# Altium PCB mLRSrxtx.PcbDoc
Units mm, origin at the board's own origin, x right, y up, seen from the top; angles counter-clockwise.
Board outline 36 x 23 mm, 2 copper layers (Top, Bottom); 21 components, 28 nets, 94 pads, 62 vias.
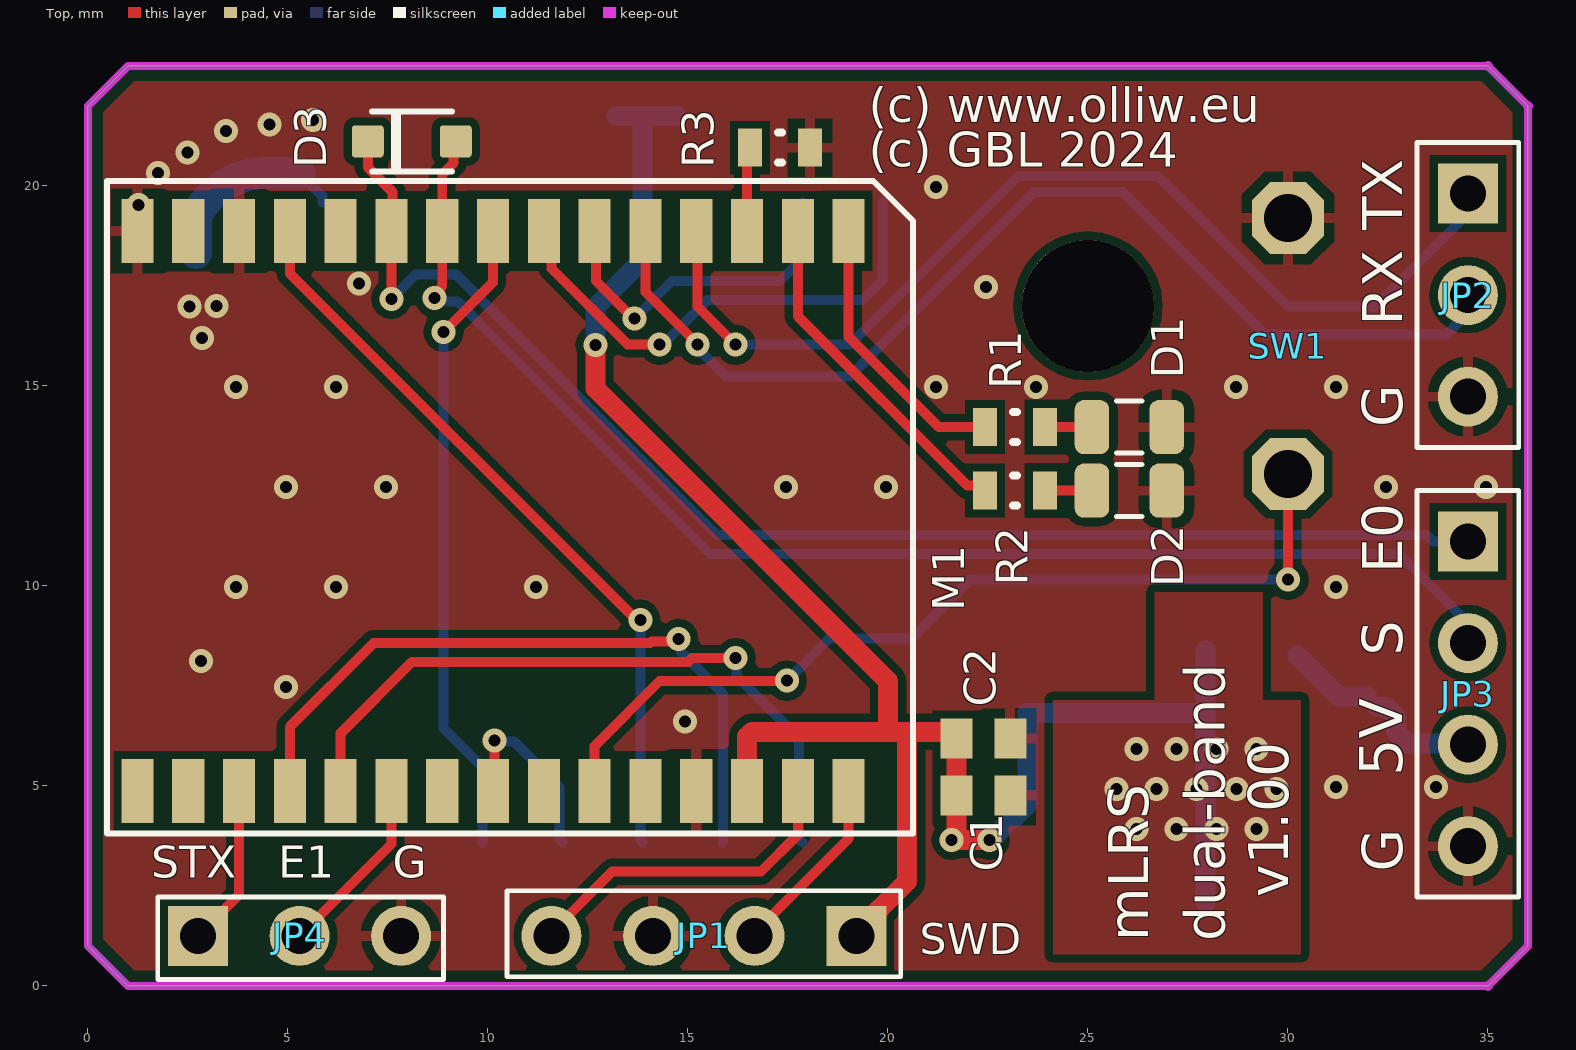
[diagram p0: Top view]
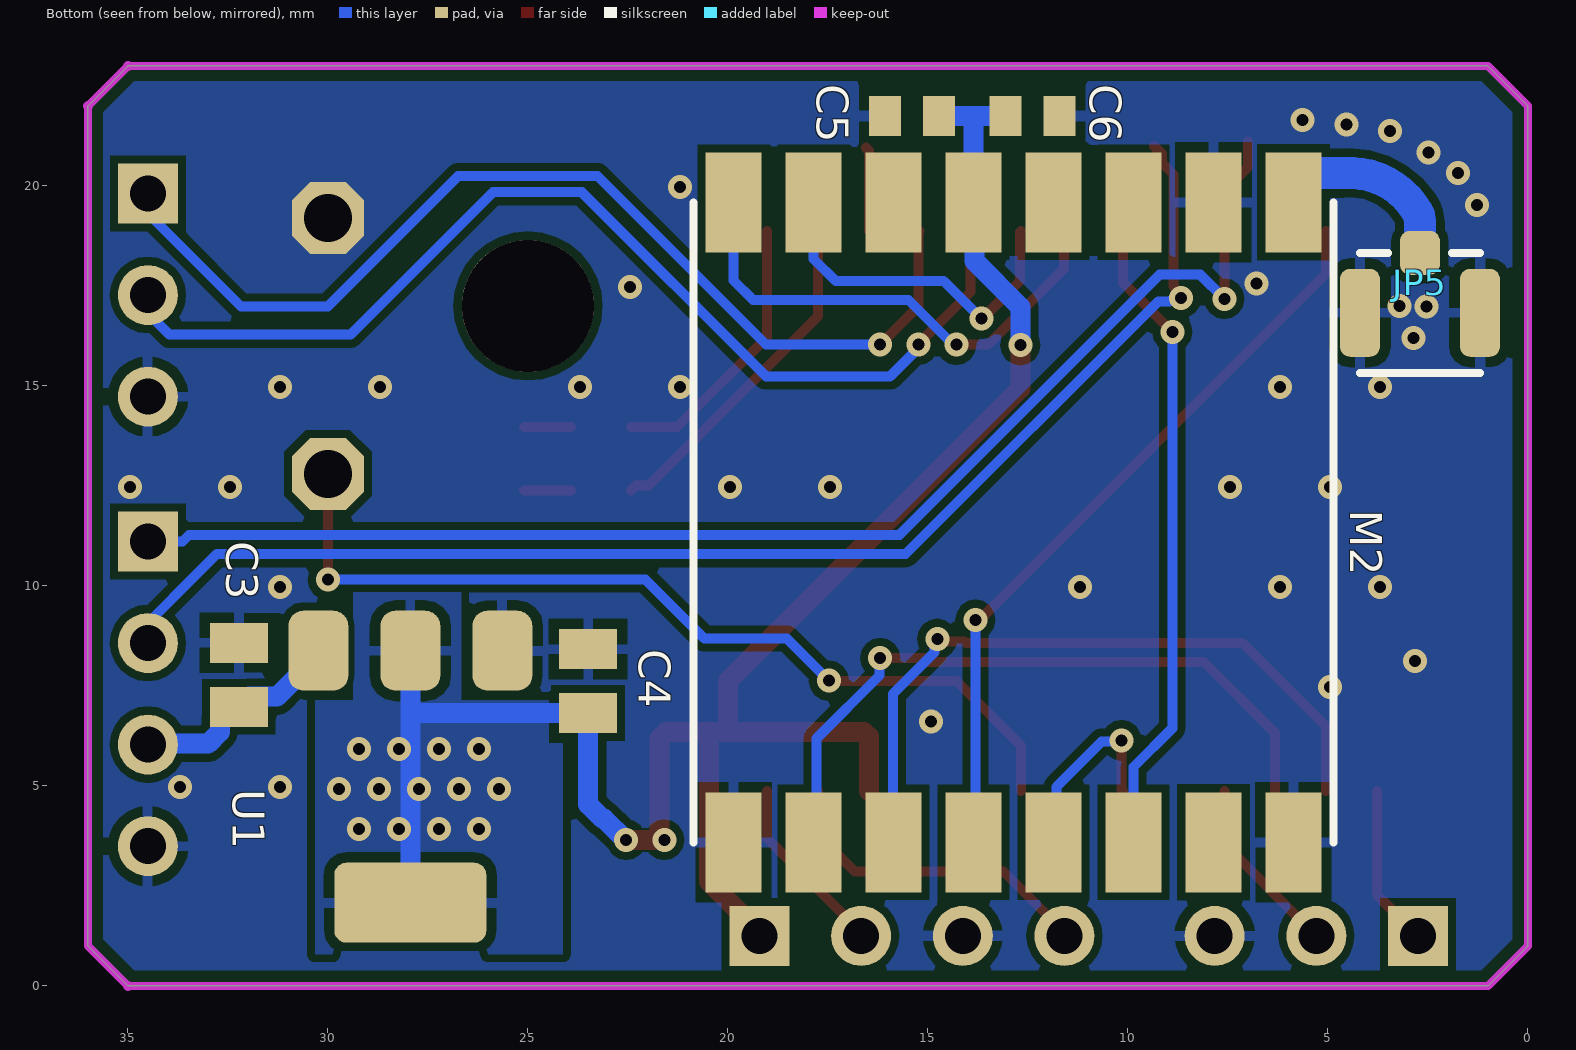
[diagram p1: Bottom view, seen from below]
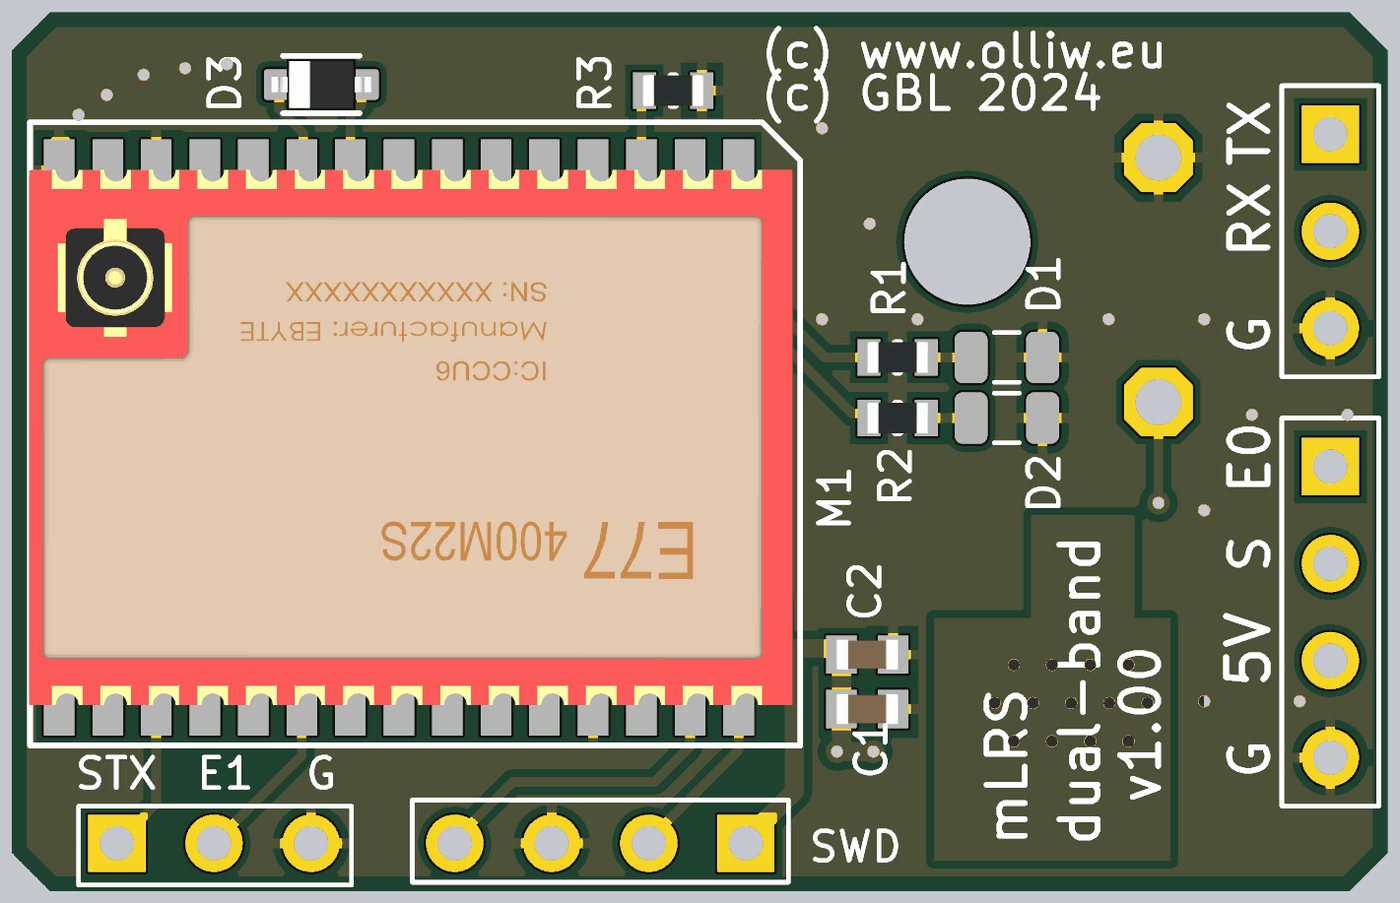
[diagram p2: 3D render of the assembled board from above, using the file's embedded part models]
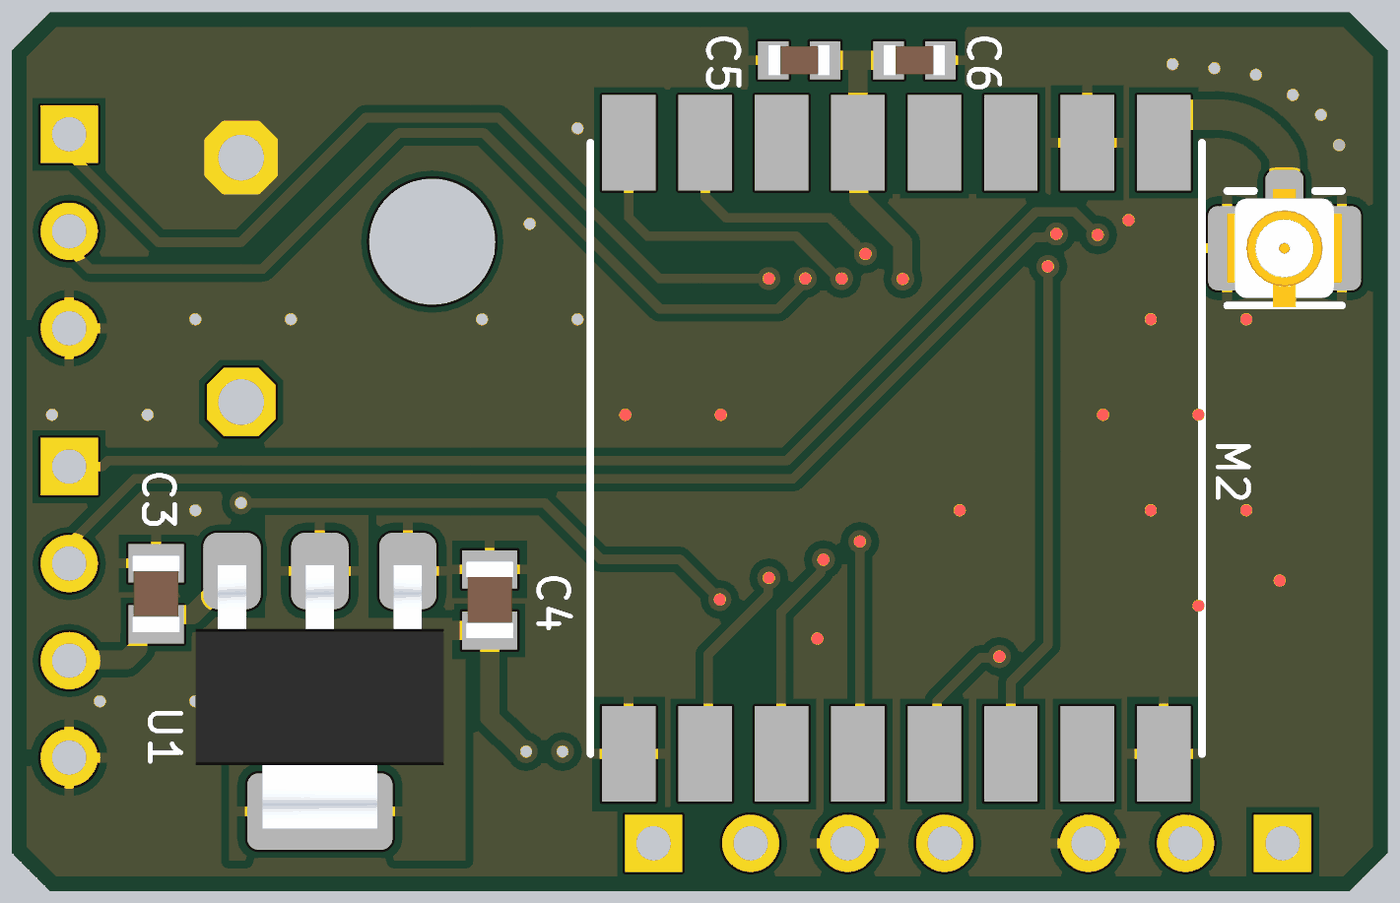
[diagram p3: 3D render of the assembled board from below, using the file's embedded part models]

## Layer stack, top to bottom
Top Solder: solder mask 0.0102, Solder Resist, Dk 3.5
Top: signal copper 0.0356
Dielectric 1: dielectric 0.32, FR-4, Dk 4.8
Bottom: signal copper 0.0356
Bottom Solder: solder mask 0.0102, Solder Resist, Dk 3.5

## Board outline
0,1 1,0 35,0 36,1 36,22 35,23 1,23 0,22

## Design rules (kind name [scope] priority, off if disabled: settings)
BoardOutlineClearance mdCopperDimension [All] p1: gap=0.254 ignorepadtopadclearanceinfootprint=FALSE except(0: Arc-SplitContinuation Track-SplitContinuation SMDPad-SplitContinuation THPad-SplitContinuation Via-SplitContinuation Fill-SplitContinuation Poly-SplitContinuation Region-SplitContinuation Text-SplitContinuation; 0.381: Poly-OutlineEdge Poly-CavityEdge Poly-CutoutEdge Poly-SplitBarrior)
Clearance Clearance_for_PolygonClass_Isolate_8 [InPolygonClass('Isolate_8') vs IsArc Or IsTrack Or IsPad Or IsVia Or IsFill Or IsRegion Or IsText] p1: gap=0.203 ignorepadtopadclearanceinfootprint=FALSE
Clearance [All] p2: gap=0.152 ignorepadtopadclearanceinfootprint=FALSE
HoleSize [All] p1: absolutevalues=TRUE maxlimit=5 minlimit=0.25 maxpercent=80.000 minpercent=20.000
HoleToHoleClearance mdDrill [All] p1: gap=0.152 allowstackedmicrovias=TRUE
MinimumSolderMaskSliver [All] p1 off: minsoldermaskwidth=0.254
PasteMaskExpansion mlMinCreamFrame [All] p1: expansion=0
PolygonConnect PolygonConnect_4 [InComponent('IC1') vs IsNamedPolygon('Polygon_2_Net_GND') Or IsNamedPolygon('3.3V_L02_P035') Or IsNamedPolygon('Polygon_1_Net_GND')] p1: thpad.connectstyle=Relief thpad.reliefconductorwidth=0.254 thpad.reliefentries=4 thpad.polygonreliefangle="90 Angle" thpad.airgapwidth=0.254 smdpad.connectstyle=Direct smdpad.reliefconductorwidth=0.254 smdpad.reliefentries=4 smdpad.polygonreliefangle="90 Angle" smdpad.airgapwidth=0.254 via.connectstyle=Relief via.reliefconductorwidth=0.254 via.reliefentries=4 via.polygonreliefangle="90 Angle" via.airgapwidth=0.254
PolygonConnect PolygonConnect_3 [InComponent('XP1') vs IsNamedPolygon('Polygon_1_Net_GND')] p2: thpad.connectstyle=Relief thpad.reliefconductorwidth=0.254 thpad.reliefentries=4 thpad.polygonreliefangle="90 Angle" thpad.airgapwidth=0.254 smdpad.connectstyle=Direct smdpad.reliefconductorwidth=0.254 smdpad.reliefentries=4 smdpad.polygonreliefangle="90 Angle" smdpad.airgapwidth=0.254 via.connectstyle=Relief via.reliefconductorwidth=0.254 via.reliefentries=4 via.polygonreliefangle="90 Angle" via.airgapwidth=0.254
PolygonConnect PolygonConnect_2 [InComponent('IC2') vs IsNamedPolygon('Polygon_2_Net_GND')] p3: thpad.connectstyle=Relief thpad.reliefconductorwidth=0.254 thpad.reliefentries=4 thpad.polygonreliefangle="90 Angle" thpad.airgapwidth=0.254 smdpad.connectstyle=Direct smdpad.reliefconductorwidth=0.254 smdpad.reliefentries=4 smdpad.polygonreliefangle="90 Angle" smdpad.airgapwidth=0.254 via.connectstyle=Relief via.reliefconductorwidth=0.254 via.reliefentries=4 via.polygonreliefangle="90 Angle" via.airgapwidth=0.254
PolygonConnect PolygonConnect_1 [InComponent('IC3') vs IsNamedPolygon('Polygon_1_Net_GND')] p4: thpad.connectstyle=Relief thpad.reliefconductorwidth=0.254 thpad.reliefentries=4 thpad.polygonreliefangle="90 Angle" thpad.airgapwidth=0.254 smdpad.connectstyle=Direct smdpad.reliefconductorwidth=0.254 smdpad.reliefentries=4 smdpad.polygonreliefangle="90 Angle" smdpad.airgapwidth=0.254 via.connectstyle=Relief via.reliefconductorwidth=0.254 via.reliefentries=4 via.polygonreliefangle="90 Angle" via.airgapwidth=0.254
PolygonConnect PolygonConnect_For_PolygonThermal_ON_Width100000_Gap100000 [InPolygonClass('PolygonThermal_ON_Width100000_Gap100000') vs Not IsVia] p5: connectstyle=Relief reliefconductorwidth=0.254 reliefentries=4 polygonreliefangle="90 Angle" airgapwidth=0.254
PolygonConnect PolygonConnect_For_PolygonThermal_ON_Width80000_Gap100000 [InPolygonClass('PolygonThermal_ON_Width80000_Gap100000') vs Not IsVia] p6: connectstyle=Relief reliefconductorwidth=0.203 reliefentries=4 polygonreliefangle="90 Angle" airgapwidth=0.254
PolygonConnect PolygonConnect_For_PolygonThermal_OFF [InPolygonClass('PolygonThermal_OFF')] p7: connectstyle=Direct reliefconductorwidth=0.254 reliefentries=4 polygonreliefangle="90 Angle" airgapwidth=0.254
PolygonConnect ThermalVias [IsVia] p8: connectstyle=Direct reliefconductorwidth=0.254 reliefentries=4 polygonreliefangle="90 Angle" airgapwidth=0.254
PolygonConnect [All] p9: connectstyle=Relief reliefconductorwidth=0.254 reliefentries=4 polygonreliefangle="90 Angle" airgapwidth=0.254
RoutingVias [All] p1: holewidth=0.33 width=0.686 viastyle="Through Hole" minholewidth=0.33 minwidth=0.686 maxholewidth=2.54 maxwidth=2.54
SilkToSilkClearance [All] p1: silktosilkclearance=0.1
SilkToSolderMaskClearance [IsPad] p1: minsilkscreentomaskgap=0.05 clearancetoexposedcopper=TRUE
SolderMaskExpansion mlMinStopFrame [All] p1: expansion=0.064 istentingtop=FALSE
SupplyNets "Schematic Supply Nets_2" [InNet('GND')] p1: voltage=0.000
SupplyNets "Schematic Supply Nets_1" [InNet('3.3V')] p2: voltage=0.000
SupplyNets "Schematic Supply Nets" [InNet('VCC')] p3: voltage=0.000
Width [All] p1: maxlimit=3 minlimit=0.2 preferedwidth=0.25
24 further rules are at their usual default settings.

## Classes and differential pairs
polygon class PolygonThermal_ON_Width100000_Gap100000: Polygon_1_Net_GND Polygon_2_Net_GND
polygon class Isolate_8: Polygon_1_Net_GND Polygon_2_Net_GND

## Components (designator, comment, footprint, x,y, rotation, side; value= is the part's Value field where it differs from the comment)
C1 "nc" C-0603 22.384,4.763 r0 top
C2 "nc" C-0603 22.384,6.191 r0 top
C3 "nc" C-0805 32.226,7.779 r90 bottom
C4 "nc" C-0805 23.495,7.62 r90 bottom
C5 "nc" C-0603 15.399,21.749 r0 bottom
C6 "nc" C-0603 12.383,21.749 r180 bottom
D1 "LED_1" LED_0805 26.035,13.97 r180 top
D2 "LED_1" LED_0805 26.035,12.383 r180 top
D3 "DIODSH" SOD-323 8.096,21.114 r0 top
JP1 "Header 4" HDR1X4 19.209,1.25 r180 top locked
JP2 "Header 3" HDR1X3 34.5,19.812 r270 top locked
JP3 "Header 4" HDR1X4 34.5,11.112 r270 top
JP4 "Header 3" HDR1X3 2.75,1.25 r0 top locked
JP5 "U.FL-R-SMT-1" U.FL-R-SMT-1 2.699,16.828 r180 bottom value={Value}
M1 "E77-400M22S" E77XX-M22 10.128,11.874 r270 top
M2 "LORA1262" LGA16_LORA1280 12.859,11.589 r90 bottom
R1 "RES" R-0603 23.177,13.97 r180 top
R2 "RES" R-0603 23.177,12.383 r180 top
R3 "RES" R-0603 17.304,20.955 r180 top
SW1 "BUTTON6X3.5" BUTTON-THT 30,16 r90 top
U1 "LDL1117S33R" SOT223 27.94,5.08 r0 bottom value={Value}

## Footprints (in the part's own frame and the unit in brackets; to place one, negate y for a bottom-side part, rotate by r counter-clockwise, add the part's x,y. Pads: shape width x height; smd on the part's side, far side on the other; paste and mask are expansions set on the pad)
BUTTON-THT [mm] "BUTTON-THT"
  oct 1.8x1.8 / inner round 1.663 / far side oct 1.8x1.8 hole 1.2: 1(-3.2,0) 2(3.2,0)
C-0603 [mm] "Chip Capacitor, 2-Leads, Body 1,60x0,80mm, IPC Medium Density"
  rect 0.8x1 smd: 1(-0.675,0) 2(0.675,0)
  body extent -0.8,-0.4 0.8,0.4, height 0.8
C-0805 [mm] "Chip Capacitor, 2-Leads, Body 2,00x1,25mm, IPC Medium Density"
  rect 1x1.45 smd: 1(-0.8,0) 2(0.8,0)
  body extent -1,-0.63 1,0.63, height 1.25
E77XX-M22 [mm]
  rect 1.6x0.8 smd: 1(-7,8.89) 2(-7,7.62) 3(-7,6.35) 4(-7,5.08) 5(-7,3.81) 6(-7,2.54) 7(-7,1.27) 8(-7,0) 9(-7,-1.27) 10(-7,-2.54) 11(-7,-3.81) 12(-7,-5.08) 13(-7,-6.35) 14(-7,-7.62) 15(-7,-8.89) 16(7,-8.89) 17(7,-7.62) 18(7,-6.35) 19(7,-5.08) 20(7,-3.81) 21(7,-2.54) 22(7,-1.27) 23(7,0) 24(7,1.27) 25(7,2.54) 26(7,3.81) 27(7,5.08) 28(7,6.35) 29(7,7.62) 30(7,8.89)
  silkscreen extent -8.25,-9.65 8.06,10.5, body extent -7,-9.68 7,10.3, height 2.7
HDR1X3 [mm] "Connector; Header; 3 Position"
  rect 1.5x1.5 hole 0.9: 1(0,0)
  round 1.5 hole 0.9: 2(2.54,0) 3(5.08,0)
  silkscreen extent -1.27,-1.27 6.35,1.27
HDR1X4 [mm] "Connector; Header; 4 Position"
  rect 1.5x1.5 hole 0.9: 1(0,0)
  round 1.5 hole 0.9: 2(2.54,0) 3(5.08,0) 4(7.62,0)
  silkscreen extent -1.11,-1.13 8.73,1.02
LED_0805 [mm] "LED, Chip; 2.00 mm L X 1.25 mm W X 0.80 mm H body"
  rrect51% 0.86x1.35 smd: A(0.935,0) K(-0.935,0)
  silkscreen extent -0.33,-0.65 0.33,0.65, body extent -1,-0.63 1,0.63, height 0.25
LGA16_LORA1280 [mm]
  rect 2.5x1.4 smd: 1(-8,7) 2(-8,5) 3(-8,3) 4(-8,1) 5(-8,-1) 6(-8,-3) 7(-8,-5) 8(-8,-7) 9(8,-7) 10(8,-5) 11(8,-3) 12(8,-1) 13(8,1) 14(8,3) 15(8,5) 16(8,7)
  silkscreen extent -8,-8 8,8, body extent -7.5,-7.51 7.5,7.51, height 1.5
R-0603 [mm] "Chip Resistor, 2-Leads, Body 1,60x0,82mm, IPC Medium Density"
  rect 0.6x0.95 smd: 1(-0.75,0) 2(0.75,0)
  silkscreen extent -0.05,-0.38 0.05,0.38, body extent -0.8,-0.4 0.8,0.4, height 0.45
SOD-323 [mm]
  rrect20% 0.8x0.8 smd mask+0.07: 1(-1.1,0) 2(1.1,0)
  silkscreen extent -1,-0.75 1,0.75, body extent -1.3,-0.68 1.3,0.67, height 1.1
SOT223 [mm]
  rrect50% 1.5x2 smd: 1(-2.3,-3.3) 2(0,-3.3) 3(2.3,-3.3)
  rrect30% 3.8x2 smd: 4(0,3)
  body extent -3.25,-3.45 3.25,3.45, height 1.7
U.FL-R-SMT-1 [mm]
  rrect50% 1x1.1 smd mask+0.06: 1(0,1.5)
  rrect50% 1x2.2 smd mask+0.06: 2(-1.5,0) 2(1.5,0)
  silkscreen extent -1.5,-1.5 1.5,1.5, body extent -1.5,-1.55 1.5,1.55, height 1.25

## Part data
C1 C2 C3 C4 C5 C6: library part CAPN, Voltage=50V, Вид=Конденсатор, Точність/група=NP0
JP1 JP3: "Header, 4-Pin", LatestRevisionDate=17-Jul-2002, LatestRevisionNote="Re-released for DXP Platform.", Publisher="Altium Limited"
JP2 JP4: "Header, 3-Pin", LatestRevisionDate=17-Jul-2002, LatestRevisionNote="Re-released for DXP Platform.", Publisher="Altium Limited"
D1 D2: Вид=Світлодіод
D3: Вид=Діод
JP5 U1: Mounting  Method=SMD
R1 R2 R3: Вид=Резистор, Точність/група=5%
SW1: DeviceName=6X3.5, DeviceSetName=BUTTON, GateName_1=G$1, LibraryName="# stdlib", SymbolName_1=BUTTON

## Free pads (board coordinates)
  round 3.302 hole 3.302 unplated: MH1(25,17)

## Via types
v1: diameter 0.6, hole 0.3, Top to Bottom, tented both sides, 62 vias

## Nets (pads, with @x,y where several pads share a name; then routed paths per layer and width w, separated by ;. In a path a pad name is that pad's centre, name@x,y a point inside that pad or via, vN(x,y) a via of type N, cw(c..) or ccw(c..) an arc to the next point about the centre after c; other vN are vias at no path point)
3.3V: C1.1 C2.1 C4.1 C5.1 C6.1 JP1.1 M1.28 M2.13 U1.2 U1.4 | length 50.6
  Top w0.25: v1(21.59,3.651) 21.59,3.746 v1@21.709,3.865
  Top w0.5: v1(12.689,16.022) 12.689,14.934 20.002,7.62 20.002,6.35 ; M1.28 16.478,6.232 16.596,6.35 20.002,6.35 ; JP1.1@19.209,1.338 20.479,2.608 20.479,6.35 ; v1(21.59,3.651) v1(22.543,3.651) ; v1@21.709,3.865 C1.1 C2.1 21.55,6.35 20.479,6.35 ; 20.002,6.35 20.479,6.35
  Bottom w0.25: 27.934,6.82 27.94,6.826
  Bottom w0.5: v1(12.689,16.022) 12.689,16.975 13.841,18.127 13.841,19.571 M2.13 13.859,21.749 ; C6.1@13.216,21.749 13.859,21.749 ; C5.1 13.859,21.749 ; v1(22.543,3.651) 22.57,3.651 23.102,4.184 23.141,4.184 23.495,4.537 C4.1 27.934,6.82 ; U1.4 27.94,6.826 U1.2
  other v1: 26.217,3.921 27.217,3.921 28.218,3.921 29.218,3.921 25.717,4.921 26.718,4.921 27.718,4.921 28.718,4.921 29.718,4.921 26.217,5.921 27.217,5.921 28.218,5.921 29.218,5.921
BUTTON: M1.25 SW1.1 | length 22.8
  Top w0.25: M1.25 12.668,6.001 14.287,7.62 17.462,7.62 v1(17.474,7.631) ; SW1.1 30.004,12.796 v1(30.004,10.16)
  Bottom w0.25: v1(17.474,7.631) 18.528,8.685 20.592,8.685 22.066,10.16 v1(30.004,10.16)
GND: C1.2 C2.2 C3.2 C4.2 C5.2 C6.2 D1.K D2.K JP1.3 JP2.3 JP3.4 JP4.3 JP5.2 M1.13 M1.15 M1.27 M2.1 M2.8 M2.10 R3.1 SW1.2 U1.1
  other v1: 31.198,4.968 33.698,4.968 14.922,6.61 4.948,7.468 2.826,8.128 3.698,9.968 6.198,9.968 11.198,9.968 31.198,9.968 4.948,12.468 7.448,12.468 17.448,12.468 19.948,12.468 32.448,12.468 34.948,12.468 3.698,14.968 6.198,14.968 21.198,14.968 23.698,14.968 28.698,14.968 31.198,14.968 2.857,16.192 2.54,16.986 3.213,17.004 22.448,17.468 6.779,17.564 1.27,19.526 21.198,19.968 1.746,20.32 2.483,20.842 3.449,21.369 4.535,21.54 5.63,21.646
LED_GREEN: M1.2 R2.2 | length 8.6
  Top w0.25: M1.2 17.748,16.744 21.988,12.504 22.306,12.504 R2.2
LED_RED: M1.1 R1.2 | length 7
  Top w0.25: M1.1 19.018,16.224 21.273,13.97 R1.2
NetD1_A: D1.A R1.1 | length 1.2
  Top w0.25: R1.1 D1.A
NetD2_A: D2.A R2.1 | length 1.2
  Top w0.25: R2.1 D2.A
NetJP5_1: JP5.1 M2.9 | length 4.9
  Bottom w0.25: M2.9@5.284,20.32 5.859,19.745 M2.9
  Bottom w0.8: JP5.1 2.699,19.11 cw(c3.175,19.109) 2.762,19.345 cw(c4.457,18.37) 4.606,20.32 M2.9@5.284,20.32
NetM1_3: M1.3 R3.2 | length 2.1
  Top w0.25: M1.3 16.478,20.879 R3.2
PIN_EXTRA1: JP4.2 M1.21 | length 4.6
  Top w0.25: JP4.2 7.588,3.548 M1.21
SPI1_CS: M1.23 M2.5 | length 4.8
  Top w0.25: M1.23 10.16,4.906 v1(10.16,6.139)
  Bottom w0.25: v1(10.16,6.139) 10.193,6.106 10.658,6.106 11.786,4.978 11.786,3.662 M2.5
SPI1_MISO: M1.20 M2.2 | length 17.4
  Top w0.25: M1.20 6.318,6.318 8.096,8.096 15.003,8.096 15.104,8.197 v1(16.192,8.197)
  Bottom w0.25: v1(16.192,8.197) 16.21,8.179 16.21,7.761 17.78,6.191 17.78,3.668 M2.2
SPI1_MOSI: M1.19 M2.3 | length 17.8
  Top w0.25: M1.19 5.048,6.477 7.144,8.572 14.05,8.572 14.089,8.611 14.701,8.611 v1(14.764,8.674)
  Bottom w0.25: v1(14.764,8.674) 14.831,8.607 14.831,8.347 15.875,7.303 15.875,3.605 M2.3
SPI1_SCK: M1.12 M2.4 | length 19
  Top w0.25: M1.12 5.048,17.812 13.643,9.217 13.744,9.217 v1(13.811,9.15)
  Bottom w0.25: v1(13.811,9.15) 13.811,3.636 M2.4
SWCLK: JP1.2 M1.30 | length 4.5
  Top w0.25: JP1.2@16.669,1.338 19.018,3.688 M1.30
SWDIO: JP1.4 M1.29 | length 8.3
  Top w0.25: JP1.4@11.589,1.338 13.108,2.857 16.828,2.857 17.748,3.778 M1.29
SWUART_TX: JP4.1 M1.18 | length 4.1
  Top w0.25: JP4.1 3.778,2.278 M1.18
SX2_BUSY: M1.7 M2.16 | length 12.7
  Top w0.25: M1.7 11.592,18.68 11.592,17.935 13.494,16.034 v1(14.287,16.034)
  Bottom w0.25: v1(14.287,16.034) 14.375,16.034 15.486,17.145 19.367,17.145 19.859,17.636 M2.16
SX2_DIO: M1.6 M2.15 | length 8.8
  Top w0.25: M1.6 12.7,18.843 12.7,17.621 13.641,16.68 v1(13.664,16.68)
  Bottom w0.25: v1(13.664,16.68) 14.605,17.621 17.304,17.621 17.859,18.176 M2.15
SX2_RESET: M1.8 M2.6 | length 16.2
  Top w0.25: v1(8.89,16.351) 10.128,17.59 M1.8
  Bottom w0.25: v1(8.89,16.351) 8.89,6.441 9.859,5.473 M2.6
SX2_RX_EN: M1.22
SX2_TX_EN: M1.11
UART1_RX: JP2.2 M1.5 | length 27.9
  Top w0.25: M1.5 13.938,17.346 15.24,16.044 v1(15.24,16.034)
  Bottom w0.25: v1(15.24,16.034) 15.24,15.943 15.943,15.24 19.05,15.24 23.654,19.844 25.876,19.844 29.439,16.281 33.958,16.281 JP2.2@34.949,17.272 ; JP2.2@34.532,16.856 JP2.2@34.949,17.272 ; JP2.2@35,17.272 JP2.2@34.949,17.272
UART1_TX: JP2.1 M1.4 | length 26.3
  Top w0.25: M1.4 15.24,18.843 15.24,16.986 v1(16.192,16.034)
  Bottom w0.25: v1(16.192,16.034) 19.05,16.034 23.262,20.246 26.744,20.246 30.004,16.986 32.174,16.986 JP2.1@35,19.812
UART2_RX: D3.1 JP3.1 M1.10 | length 34.6
  Top w0.25: D3.1 6.996,20.468 7.62,19.844 7.62,18.906 M1.10 v1(7.588,17.177)
  Bottom w0.25: v1(7.588,17.177) 8.191,17.78 9.208,17.78 15.716,11.271 33.474,11.271 33.633,11.112 JP3.1@35,11.112
UART2_TX: D3.2 JP3.2 M1.9 | length 34
  Top w0.25: v1(8.668,17.203) 8.668,17.297 8.858,17.488 8.858,20.288 9.144,20.574 9.144,20.794 D3.2@9.343,20.993
  Bottom w0.25: v1(8.668,17.203) 8.735,17.136 8.939,17.136 8.961,17.114 9.238,17.114 15.557,10.795 32.778,10.795 JP3.2@35,8.572
VCC: C3.1 JP3.3 U1.3 | length 5.5
  Bottom w0.25: U1.3@30.24,8.265 U1.3 ; C3.1@31.972,7.233 C3.1 ; JP3.3@34.478,6.055 JP3.3
  Bottom w0.5: U1.3@30.24,8.265 31.273,7.233 C3.1@31.972,7.233 ; C3.1 32.451,6.979 32.701,6.729 32.701,6.348 32.994,6.055 JP3.3@34.478,6.055
VDD_TCXO: M1.24
pads on no net: M1.14 M1.16 M1.17 M1.26 M2.7 M2.11 M2.12 M2.14

## Polygon pours and split planes (outlines as drawn)
GND on Bottom "Polygon_1_Net_GND" (solid, remove dead copper, pour order 36): 0.032,23 36,23 36,0.191 0.032,0.191
3.3V on Bottom "3.3V_L02_P035" (solid, remove dead copper, pour order 35): 26.67,9.842 26.67,7.144 24.13,7.144 24.13,0.794 30.321,0.794 30.321,7.144 29.369,7.144 29.369,9.842
GND on Top "Polygon_2_Net_GND" (solid, remove dead copper, pour order 37): 0,23 36,23 36,0 0,0
3.3V on Top "3.3V_L01_P034" (solid, pour order 34): 24.13,7.144 24.13,0.794 30.321,0.794 30.321,7.144 29.369,7.144 29.369,9.842 26.67,9.842 26.67,7.144

## Keep-outs
Keep-Out Layer:
  lines w0.2: 0,1 1,0 35,0 36,1 36,22 35,23 1,23 0,22 0,1
  lines w0.254: 35,0 35,0 ; 35,23 35,23 ; 36,22 36,22

## Other copper
Bottom:
  pour cut-out: 8.956,21.042 8.956,18.242 20.464,18.242 20.479,18.256 20.479,20.955

## Silkscreen, mask and mechanical layers (free items; w line width, h text height)
Top Overlay:
  text "(c) www.olliw.eu" at 19.526,21.59 h0.86
  text "(c) GBL 2024" at 19.526,20.479 h0.86
  text "TX" at 32.861,18.891 h1 r90
  text "RX" at 32.861,16.51 h1 r90
  text "G" at 32.861,13.97 h1 r90
  text "E0" at 32.861,10.319 h1 r90
  text "S" at 32.861,8.255 h1 r90
  text "5V" at 32.861,5.239 h1.08 r90
  text "G" at 32.861,2.857 h1 r90
  text "STX" at 1.587,2.699 h0.8
  text "E1" at 4.763,2.699 h0.8
  text "G" at 7.62,2.699 h0.8
  text "v1.00" at 30.004,2.222 h1 r90
  text "mLRS" at 26.511,1.111 h1 r90
  text "dual-band" at 28.416,1.111 h1 r90
  text "SWD" at 20.796,0.794 h0.78
tPlace:
  lines w0.203: 6.477,0.445 6.477,2.032 7.112,2.667 8.382,2.667 9.017,2.032 9.017,0.445
  lines w0.254: 0.762,19.971 1.556,19.971 ; 3.302,3.778 4.096,3.778 ; 3.302,19.971 4.096,19.971 ; 7.112,3.778 7.906,3.778 ; 7.112,19.971 7.906,19.971 ; 8.382,19.971 9.176,19.971 ; 12.192,3.778 12.986,3.778 ; 13.462,19.971 14.256,19.971 ; 14.732,3.778 15.526,3.778 ; 14.732,19.971 15.526,19.971 ; 16.002,3.778 16.796,3.778 ; 16.002,19.971 16.796,19.971 ; 17.272,3.778 18.066,3.778 ; 17.272,19.971 18.066,19.971 ; 18.542,3.778 19.336,3.778 ; 18.542,19.971 19.336,19.971
bPlace:
  lines w0.12: 9.017,0.445 9.017,2.032
  lines w0.203: 6.477,0.445 6.477,2.032 7.112,2.667 8.382,2.667 9.017,2.032

## Dimensions
35,23 to 35,0 on Dimension
0,22 to 36,22 on Dimension